# Altium PCB GCM-Test PCB BW_PCB.PcbDoc
Units mm, origin at the board's own origin, x right, y up, seen from the top; angles counter-clockwise.
Board outline 152.4 x 101.6 mm, 2 copper layers (Top Layer, Bottom Layer); 78 components, 55 nets, 175 pads, 12 vias.
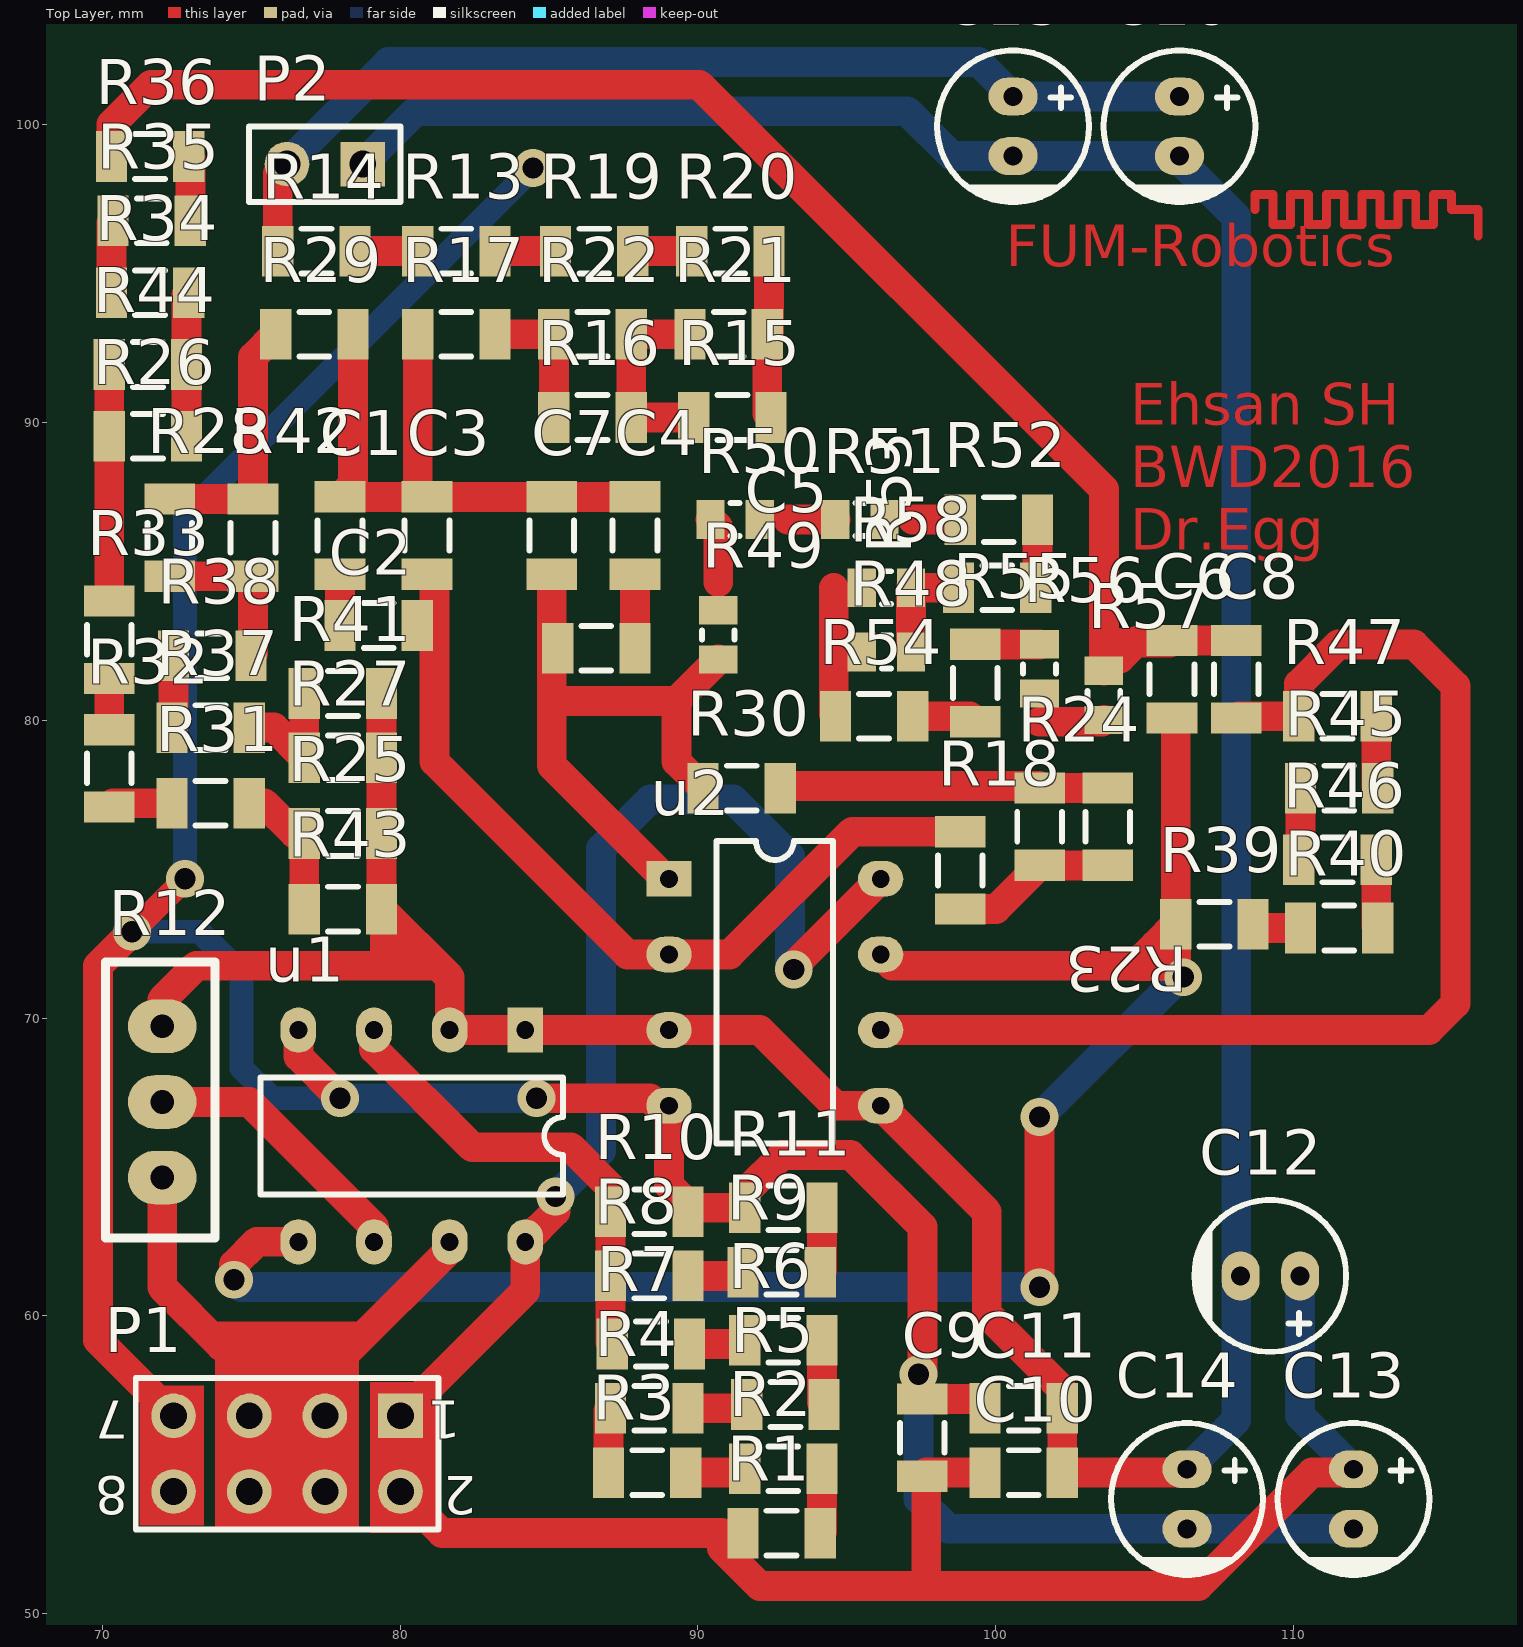
[diagram p0: Top Layer view]
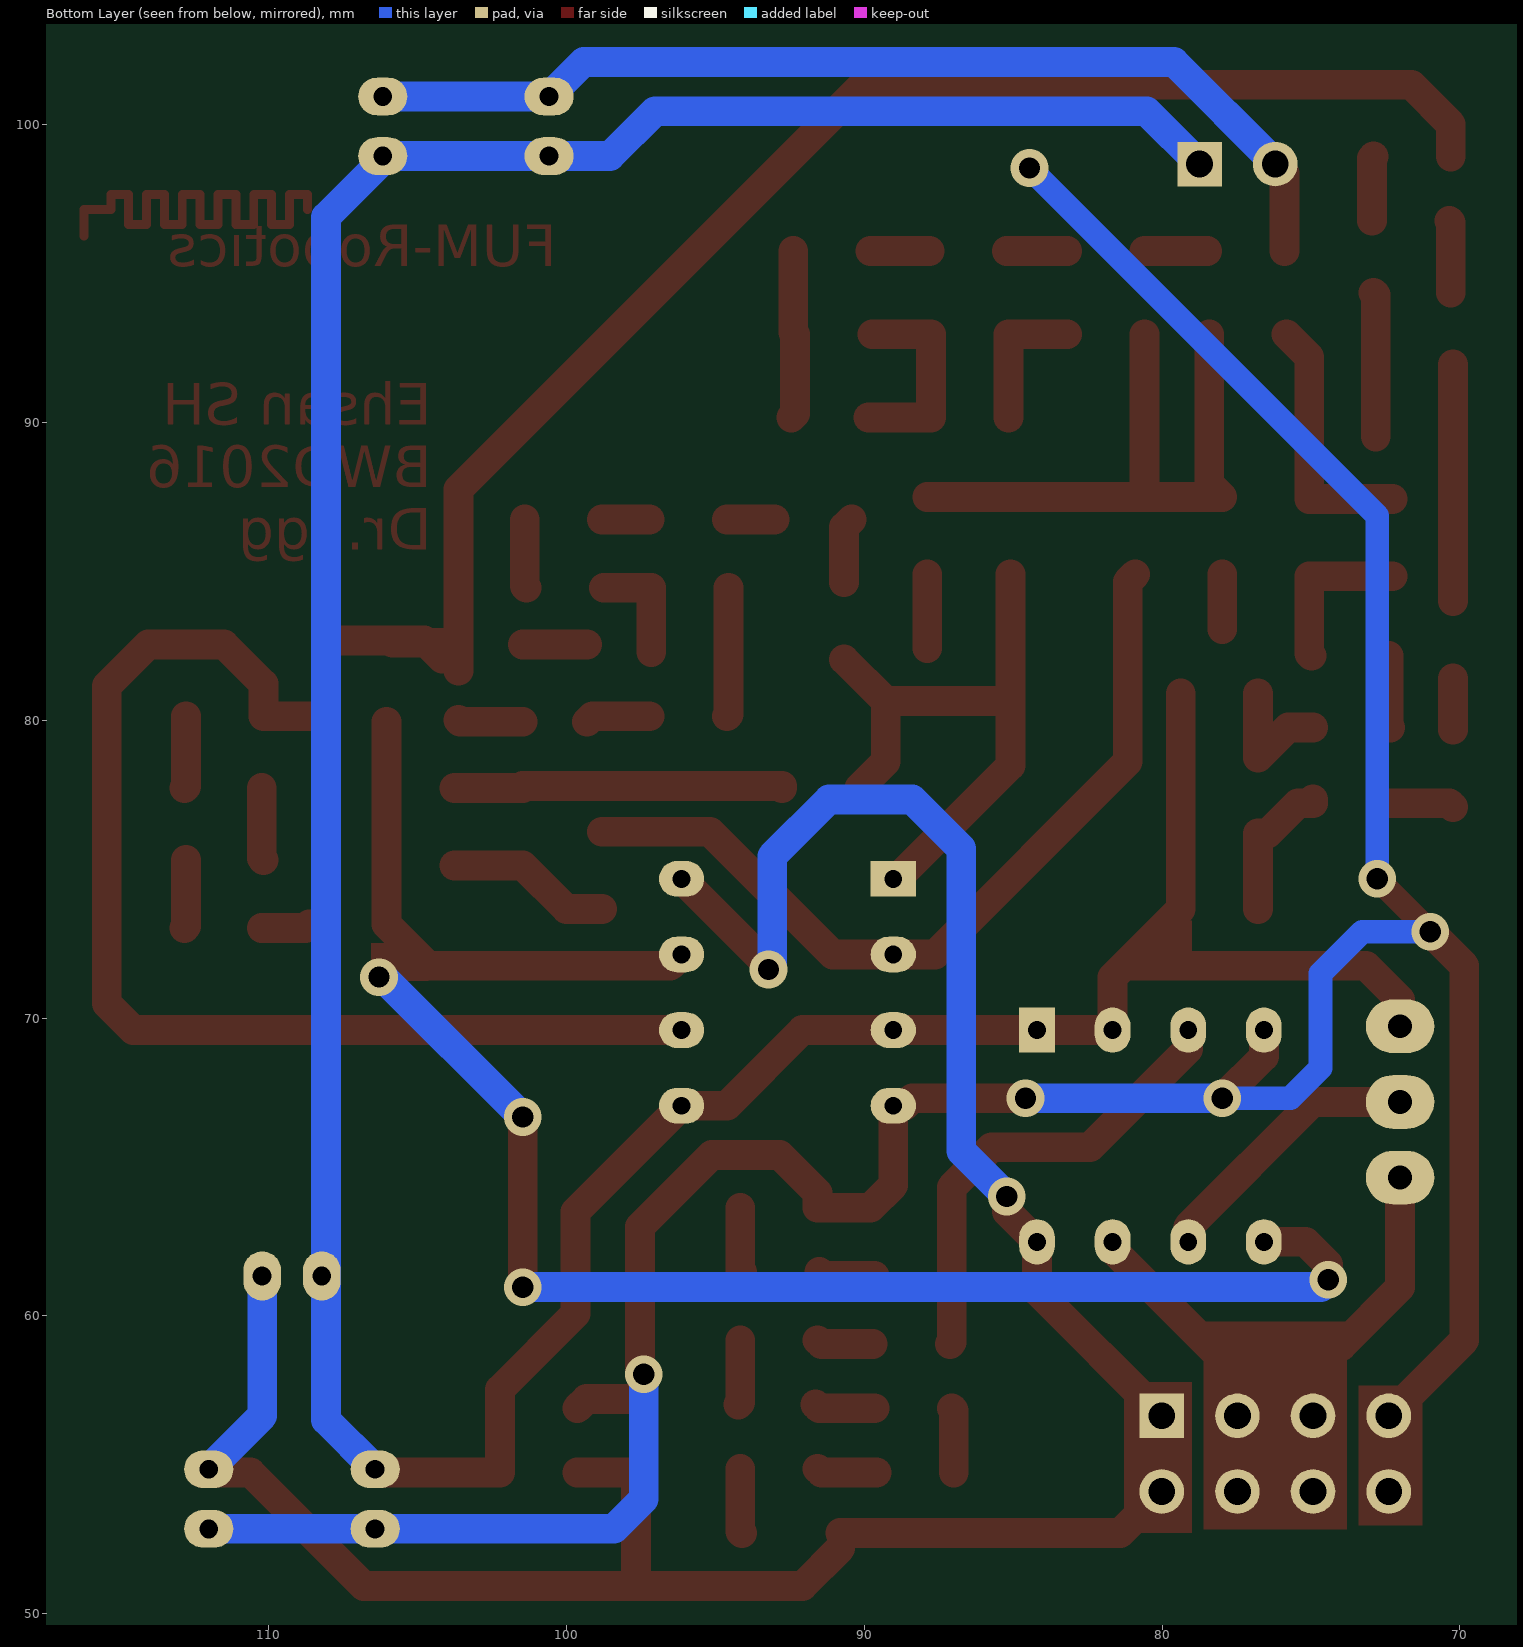
[diagram p1: Bottom Layer view, seen from below]
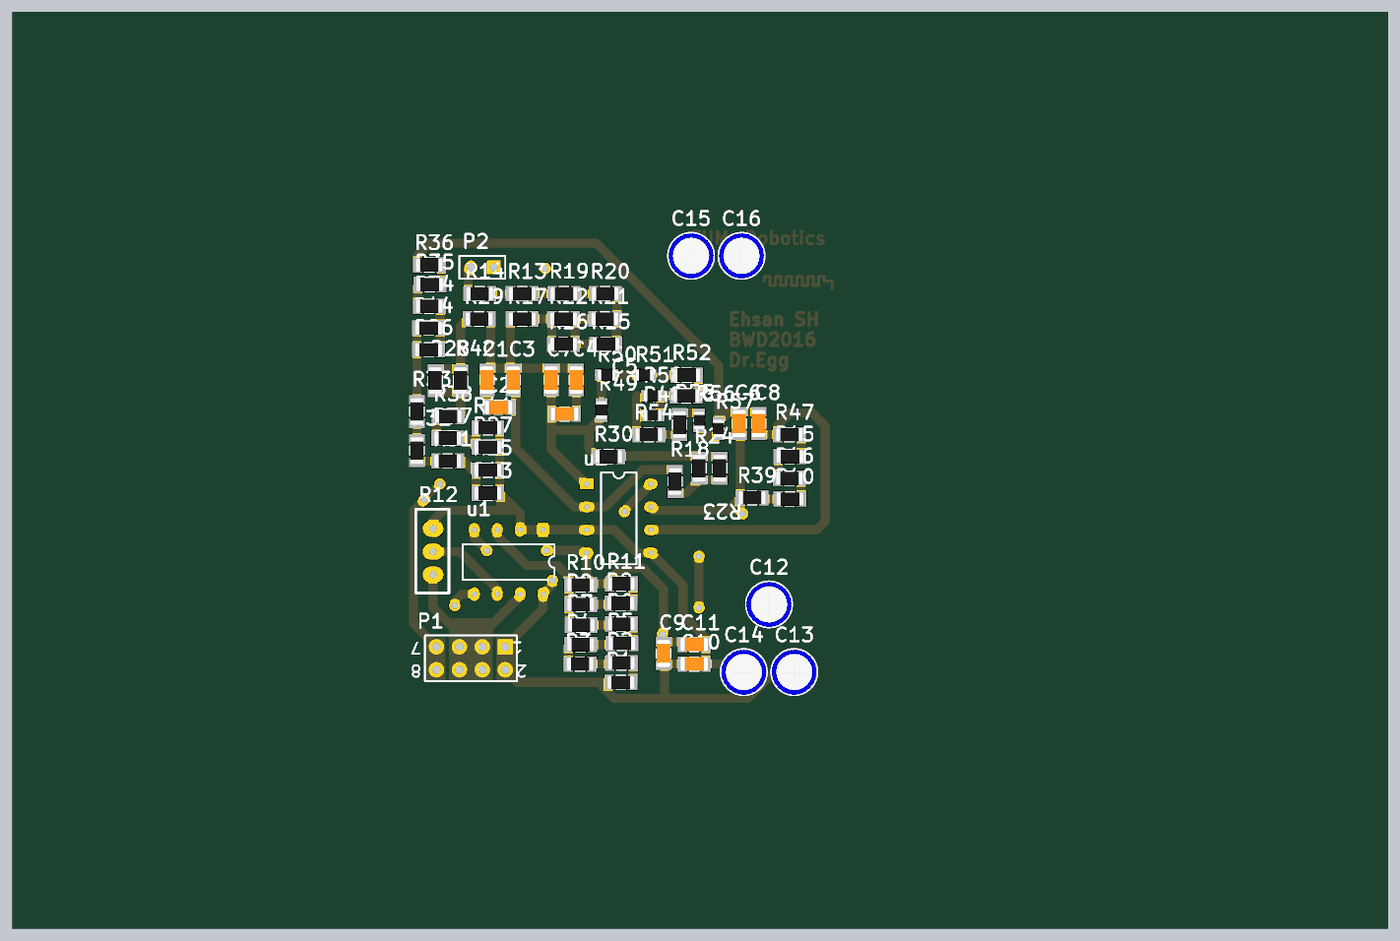
[diagram p2: 3D render of the assembled board from above, using the file's embedded part models]

## Layer stack, top to bottom
Top Solder: solder mask 0.0102, Solder Resist, Dk 3.5
Top Layer: signal copper 0.0356
Dielectric 1: dielectric 0.32, FR-4, Dk 4.8
Bottom Layer: signal copper 0.0356
Bottom Solder: solder mask 0.0102, Solder Resist, Dk 3.5

## Board outline
25.4,25.4 177.8,25.4 177.8,127 25.4,127

## Design rules (kind name [scope] priority, off if disabled: settings)
Clearance [All] p1: gap=0.254
PolygonConnect [All] p1: connectstyle=Relief reliefconductorwidth=0.254 reliefentries=4 polygonreliefangle="90 Angle" airgapwidth=0.254
RoutingVias [All] p1: holewidth=0.711 width=1.27 viastyle="Through Hole" minholewidth=0.711 minwidth=1.27 maxholewidth=0.711 maxwidth=1.27
SolderMaskExpansion [All] p1: expansion=0.102
Width [All] p1: maxlimit=1 minlimit=0.3 preferedwidth=0.7
30 further rules are at their usual default settings.

## Components (designator, comment, footprint, x,y, rotation, side; value= is the part's Value field where it differs from the comment)
C1 "1nF" SMD_CAP_1206 77.978,87.503 r270 top
C2 "1nF" SMD_CAP_1206 77.978,83.185 r0 top
C3 "10pF" SMD_CAP_1206 80.899,87.503 r270 top
C4 "1nF" SMD_CAP_1206 87.884,87.503 r270 top
C5 "1nF" SMD_CAP_1206 87.884,82.423 r180 top
C6 "1nF" SMD_CAP_1206 105.918,82.677 r270 top
C7 "10pF" SMD_CAP_1206 85.09,87.503 r270 top
C8 "1nF" SMD_CAP_1206 108.077,82.677 r270 top
C9 "1u" SMD_CAP_1206 97.536,54.61 r90 top
C10 "1u" SMD_CAP_1206 102.235,54.737 r180 top
C11 "1u" SMD_CAP_1206 102.235,56.896 r180 top
C12 "1uF   OR 680 nf Bipolar" "cap 01" 109.22,61.341 r0 top
C13 "1uF   OR 680 nf Bipolar" "cap 01" 112.014,53.848 r90 top
C14 "1uF   OR 680 nf Bipolar" "cap 01" 106.426,53.848 r90 top
C15 "Depending LC Filter Designed" "cap 01" 100.584,99.949 r90 top
C16 "Depending LC Filter Designed" "cap 01" 106.172,99.949 r90 top
P1 "Header 4X2" HDR2X4 80.01,56.642 r180 top
P2 "Header 2" HDR1X2 78.74,98.679 r180 top
R1 "0" "RES 1206 (3216X08L)" 94.107,52.705 r180 top
R2 "0" "RES 1206 (3216X08L)" 91.567,54.864 r0 top
R3 "0" "RES 1206 (3216X08L)" 86.995,54.737 r0 top
R4 "0" "RES 1206 (3216X08L)" 89.662,56.896 r180 top
R5 "0" "RES 1206 (3216X08L)" 94.234,57.023 r180 top
R6 "0" "RES 1206 (3216X08L)" 91.567,59.182 r0 top
R7 "1K" "RES 1206 (3216X08L)" 87.122,59.055 r0 top
R8 "0" "RES 1206 (3216X08L)" 89.662,61.341 r180 top
R9 "0" "RES 1206 (3216X08L)" 94.107,61.468 r180 top
R10 "NC" "RES 1206 (3216X08L)" 89.662,63.5 r180 top
R11 "1K" "RES 1206 (3216X08L)" 91.567,63.627 r0 top
R12 "POT" MOL_1 72.009,64.643 r90 top
R13 "100R" "RES 1206 (3216X08L)" 83.185,95.758 r180 top
R14 "10R" "RES 1206 (3216X08L)" 78.486,95.758 r180 top
R15 "1K" "RES 1206 (3216X08L)" 92.456,90.17 r180 top
R16 "10K" "RES 1206 (3216X08L)" 87.757,90.17 r180 top
R17 "1K" "RES 1206 (3216X08L)" 83.185,92.964 r180 top
R18 "100K" "RES 1206 (3216X08L)" 98.806,73.66 r90 top
R19 "100R" "RES 1206 (3216X08L)" 85.217,95.758 r0 top
R20 "100R" "RES 1206 (3216X08L)" 89.789,95.758 r0 top
R21 "1K" "RES 1206 (3216X08L)" 92.329,92.964 r180 top
R22 "10K" "RES 1206 (3216X08L)" 87.757,92.964 r180 top
R23 "10K" "RES 1206 (3216X08L)" 103.759,77.724 r270 top
R24 "10K" "RES 1206 (3216X08L)" 101.473,77.724 r270 top
R25 "100" "RES 1206 (3216X08L)" 79.375,76.2 r180 top
R26 "1K" "RES 1206 (3216X08L)" 70.231,89.535 r0 top
R27 "10K" "RES 1206 (3216X08L)" 79.375,78.74 r180 top
R28 "100" "RES 1206 (3216X08L)" 72.263,84.836 r90 top
R29 "100" "RES 1206 (3216X08L)" 75.819,92.964 r0 top
R30 "100K" "RES 1206 (3216X08L)" 90.17,77.724 r0 top
R31 "100" "RES 1206 (3216X08L)" 74.93,77.216 r180 top
R32 "1K" "RES 1206 (3216X08L)" 70.231,77.089 r90 top
R33 "1K" "RES 1206 (3216X08L)" 70.231,81.407 r90 top
R34 "1K" "RES 1206 (3216X08L)" 72.898,94.361 r180 top
R35 "1K" "RES 1206 (3216X08L)" 70.358,96.774 r0 top
R36 "100" "RES 1206 (3216X08L)" 72.898,98.933 r180 top
R37 "10K" "RES 1206 (3216X08L)" 74.93,79.756 r180 top
R38 "10K" "RES 1206 (3216X08L)" 72.39,82.169 r0 top
R39 "10K" "RES 1206 (3216X08L)" 106.045,73.152 r0 top
R40 "10K" "RES 1206 (3216X08L)" 110.236,73.025 r0 top
R41 "10K" "RES 1206 (3216X08L)" 79.375,80.899 r180 top
R42 "100" "RES 1206 (3216X08L)" 75.057,84.836 r90 top
R43 "100" "RES 1206 (3216X08L)" 79.375,73.66 r180 top
R44 "1K" "RES 1206 (3216X08L)" 70.231,91.948 r0 top
R45 "10K" "RES 1206 (3216X08L)" 110.236,77.724 r0 top
R46 "10K" "RES 1206 (3216X08L)" 112.776,75.311 r180 top
R47 "100K" "RES 1206 (3216X08L)" 112.776,80.137 r180 top
R48 "1K" "RES 0805 (2012X06L)" 97.155,82.296 r180 top
R49 "10" "RES 0805 (2012X06L)" 90.678,82.042 r90 top
R50 "10" "RES 0805 (2012X06L)" 90.424,86.741 r0 top
R51 "100" "RES 0805 (2012X06L)" 94.615,86.741 r0 top
R52 "1K" "RES 1206 (3216X08L)" 98.806,86.741 r0 top
R53 "1K" "RES 1206 (3216X08L)" 101.346,84.455 r180 top
R54 "1K" "RES 1206 (3216X08L)" 94.615,80.137 r0 top
R55 "1K" "RES 1206 (3216X08L)" 99.314,82.55 r270 top
R56 "10" "RES 0805 (2012X06L)" 101.473,82.55 r270 top
R57 "10" "RES 0805 (2012X06L)" 103.632,80.01 r90 top
R58 "1K" "RES 0805 (2012X06L)" 97.155,84.455 r180 top
u1 "LM358N" "lm358 dip" 84.201,69.596 r270 top
u2 "LM358N" "lm358 dip" 89.027,74.676 r0 top

## Footprints (in the part's own frame and the unit in brackets; to place one, negate y for a bottom-side part, rotate by r counter-clockwise, add the part's x,y. Pads: shape width x height; smd on the part's side, far side on the other; paste and mask are expansions set on the pad)
"cap 01" [mm]
  oval 1.27x1.651 hole 0.635: 1(1,0) 2(-1,0)
  silkscreen extent -2.55,-2.55 2.55,2.55, body extent -2.53,-2.53 2.53,2.53, height 12.54
HDR1X2 [mm] "Connector; Header; 2 Position"
  rect 1.5x1.5 hole 0.9: 1(0,0)
  round 1.5 hole 0.9: 2(2.54,0)
  silkscreen extent -1.27,-1.27 3.81,1.27
HDR2X4 [mm] "Connector; Header; 4x2 Position"
  rect 1.5x1.5 hole 0.9: 1(0,0)
  round 1.5 hole 0.9: 2(0,2.54) 3(2.54,0) 4(2.54,2.54) 5(5.08,0) 6(5.08,2.54) 7(7.62,0) 8(7.62,2.54)
  silkscreen extent -1.27,-1.27 8.89,3.81
"lm358 dip" [mm]
  rect 1.52x1.2 / inner rect 1.42x1.2 / far side rect 1.52x1.2 hole 0.6: 1(0,0)
  oval 1.52x1.2 / inner oval 1.42x1.2 / far side oval 1.52x1.2 hole 0.6: 2(0,-2.54) 3(0,-5.08) 4(0,-7.62) 5(7.11,-7.62) 6(7.11,-5.08) 7(7.11,-2.54) 8(7.11,0)
  silkscreen extent 1.59,-8.89 5.52,1.27
MOL_1 [mm]
  oval 1.8x2.3 hole 0.8: 1(0,0) 2(2.54,0) 3(5.08,0)
  silkscreen extent -2.03,-1.78 7.24,1.91
"RES 0805 (2012X06L)" [mm] "Chip Resistor, 2-Leads, Body 2.0x1.3mm, IPC High Density _ (0.100 W)"
  rect 0.95x1.3 smd: 1(0,0) 2(1.65,0)
  silkscreen extent 0.67,-0.55 0.97,0.55, body extent -0.19,-0.63 1.84,0.64, height 0.6
"RES 1206 (3216X08L)" [mm] "Chip Resistor, 2-Leads, Body 3.2x1.6mm, IPC High Density _ (0.125 W)"
  rect 1.05x1.7 smd: 1(0,0) 2(2.596,0)
  silkscreen extent 0.8,-0.75 1.8,0.75, body extent -0.23,-0.76 2.82,0.76, height 0.6
SMD_CAP_1206 [mm]
  rect 1.05x1.7 smd: 1(0,0) 2(2.596,0)
  silkscreen extent 0.8,-0.75 1.8,0.75, body extent -0.22,-0.77 2.82,0.75, height 0.75

## Part data
C1 C2 C3 C4 C5 C6 C7 C8 C9 C10 C11: library part Cap-Bipolar, "Bipolar Capacitor"
C12 C13 C14 C15 C16: library part Cap-Polar, "Polar Capacitor"
P1: "Header, 4-Pin, Dual row"
P2: "Header, 2-Pin"
R1 R2 R3 R4 R5 R6 R7 R8 R9 R10 R11 R13 R14 R15 R16 R17 R18 R19 R20 R21 R22 R23 R24 R25 R26 R27 R28 R29 R30 R31 R32 R33 R34 R35 R36 R37 R38 R39 R40 R41 R42 R43 R44 R45 R46 R47 R48 R49 R50 R51 R52 R53 R54 R55 R56 R57 R58: library part Resistor, "Resistor"

## Via types
v1: diameter 1.27, hole 0.711, Top Layer to Bottom Layer, 12 vias

## Nets (pads, with @x,y where several pads share a name; then routed paths per layer and width w, separated by ;. In a path a pad name is that pad's centre, name@x,y a point inside that pad or via, vN(x,y) a via of type N, cw(c..) or ccw(c..) an arc to the next point about the centre after c; other vN are vias at no path point)
+5: C9.1 C10.2 C12.1 C13.1 P1.1 P1.2 R1.2 u1.8 u2.8 | length 88.3
  Top Layer w1: v1(85.217,64.008) 85.217,63.502 u1.8 84.201,60.833 P1.1 P1.2 81.407,52.705 90.805,52.705 ; 90.805,52.197 92.075,50.927 106.807,50.927 110.617,54.737 C13.1@112.268,54.737 ; v1(93.218,71.628) 93.218,71.757 u2.8 ; 97.663,50.927 97.663,54.737 C10.2
  Bottom Layer w1: v1(85.217,64.008) 86.741,65.532 86.741,75.692 88.392,77.343 91.186,77.343 93.091,75.438 93.091,71.755 v1(93.218,71.628) ; C12.1 110.22,56.642 C13.1
COIL1SIGNAL: C15.1 C16.1 P2.2 R14.2 | length 34.5
  Top Layer w1: R14.2 P2.2@75.89,98.369
  Bottom Layer w1: P2.2 76.2,98.705 79.603,102.108 99.425,102.108 C15.1 C16.1
"FEEDBACK A": C5.2 C7.2 R30.1 R49.1 u2.1 | length 21.1
  Top Layer w1: C7.2 85.09,78.486 u2.1@88.9,74.676 ; 85.217,80.645 89.281,80.645 ; R30.1 89.281,78.613 89.281,80.645 ; R49.1 89.281,80.645
"FEEDBACK B": C6.2 R39.1 u1.5 u2.7 | length 61.5
  Top Layer w1: v1(74.422,61.214) 74.422,61.722 75.186,62.486 u1.5 ; u2.7 96.518,71.755 104.648,71.755 105.346,72.453 ; v1(101.473,60.96) v1(101.473,66.675) ; C6.2@106.045,79.954 R39.1 105.346,72.453 ; v1(106.299,71.374) 105.346,72.326 105.346,72.453
  Bottom Layer w1: v1(74.422,61.214) 74.664,60.972 101.461,60.972 v1(101.473,60.96) ; v1(101.473,66.675) 106.172,71.374 v1(106.299,71.374)
GND: C9.2 C11.2 C13.2 C14.2 P1.7 P1.8 R10.1 R11.1 u1.4 u2.4 | length 114.3
  Top Layer w0.8: v1(70.993,72.898) v1(72.771,74.676) ; v1@84.328,98.679 v1(84.455,98.552)
  Top Layer w1: v1(70.993,72.898) 69.85,71.755 69.85,59.182 P1.7 ; u1.4 76.581,68.707 v1(77.978,67.31) ; v1(84.582,67.31) 88.392,67.31 88.646,67.056 u2.4 89.027,64.389 89.789,63.627 R11.1 91.567,64.135 92.837,65.405 95.123,65.405 97.536,62.992 v1@97.536,58.039 ; C9.2 99.329,57.206 C11.2
  Bottom Layer w0.8: v1(70.993,72.898) 73.279,72.898 74.676,71.501 74.676,68.326 75.692,67.31 v1(77.978,67.31) ; v1(72.771,74.676) 72.771,86.868 v1(84.455,98.552)
  Bottom Layer w1: v1(77.978,67.31) v1(84.582,67.31) ; v1(97.409,58.039) 97.409,53.848 98.409,52.848 C14.2 C13.2
INA-: C2.2 C3.2 R18.2 u2.2 | length 28.4
  Top Layer w1: C3.2 81.153,84.653 81.153,78.613 87.63,72.136 u2.2 91.059,72.136 95.179,76.256 R18.2
INB-: C8.2 R47.2 u2.6 | length 39.9
  Top Layer w1: u2.6 114.554,69.596 115.443,70.485 115.443,81.153 114.046,82.55 111.506,82.55 110.18,81.224 R47.2 108.133,80.137 C8.2
NetC1_1: C1.1 C3.1 C4.1 C7.1 R17.2 R29.2 | length 20.7
  Top Layer w1: R29.2 78.415,87.94 C1.1 C3.1 C7.1 C4.1 ; C3.1@80.589,87.813 R17.2
NetC1_2: C1.2 C2.1 | length 1.8
  Top Layer w1: C2.1@77.978,83.058 C1.2
NetC4_2: C4.2 C5.1 | length 2.5
  Top Layer w1: C5.1 C4.2
NetC6_1: C6.1 C8.1 R36.2 R57.2 | length 53.1
  Top Layer w1: R36.2 70.302,100.02 71.628,101.346 90.043,101.346 103.632,87.757 R57.2 ; 103.632,82.606 C6.1@105.847,82.606 ; R57.2@104.176,82.078 104.775,82.677 C6.1 C8.1
NetR1_1: R1.1 R2.2 | length 2.2
  Top Layer w1: R1.1 94.163,52.761 R2.2
NetR2_1: R2.1 R3.2 | length 2
  Top Layer w1: R3.2 91.44,54.737 R2.1
NetR3_1: R3.1 R4.2 | length 2.2
  Top Layer w1: R3.1 86.995,56.825 R4.2
NetR4_1: R4.1 R5.2 | length 2
  Top Layer w1: R4.1 91.511,56.896 R5.2
NetR5_1: R5.1 R6.2 | length 2.2
  Top Layer w1: R6.2 94.163,57.094 R5.1
NetR6_1: R6.1 R7.2 | length 1.9
  Top Layer w1: R7.2 91.44,59.055 R6.1
NetR8_1: R8.1 R9.2 | length 1.9
  Top Layer w1: R8.1 91.384,61.341 R9.2
NetR9_1: R9.1 R11.2 | length 2.2
  Top Layer w1: R9.1 94.163,61.524 R11.2
NetR12_2: R12.2 u1.6 | length 9.4
  Top Layer w1: R12.2 74.93,67.183 79.121,62.992 u1.6
NetR13_1: R13.1 R19.1 | length 2
  Top Layer w1: R13.1 R19.1
NetR13_2: R13.2 R14.1 | length 2.1
  Top Layer w1: R14.1 R13.2
NetR15_1: R15.1 R20.2 R21.1 | length 5.7
  Top Layer w1: R20.2 92.385,93.02 R21.1 92.329,90.297 R15.1
NetR15_2: R15.2 R16.1 R21.2 R22.1 | length 6.9
  Top Layer w1: R21.2 R22.1 R16.1 R15.2
NetR16_2: R16.2 R17.1 R22.2 | length 4.8
  Top Layer w1: R17.1 R22.2 R16.2
NetR18_1: R18.1 R23.2 R24.2 | length 5.6
  Top Layer w1: R18.1 100.005,73.66 R24.2 R23.2
NetR19_2: R19.2 R20.1 | length 2
  Top Layer w1: R19.2 R20.1
NetR23_1: R23.1 R24.1 R30.2 | length 11.1
  Top Layer w1: R30.2 92.766,77.789 R24.1@101.473,77.789 ; R24.1 R23.1
NetR25_2: R25.2 R31.1 R43.2 | length 5
  Top Layer w1: R31.1 75.438,77.216 76.454,76.2 R25.2 R43.2 ; R31.1@74.93,77.343 R31.1@75.057,77.216
NetR26_1: R26.1 R33.2 R44.1 | length 7.9
  Top Layer w1: R33.2 R26.1 R44.1
NetR26_2: R26.2 R34.1 R44.2 | length 4.9
  Top Layer w1: R26.2 R44.2 72.827,94.29 R34.1
NetR27_2: R27.2 R37.1 R41.2 | length 4.4
  Top Layer w1: R37.1 75.763,79.756 R27.2 R41.2
NetR28_1: R28.1 R38.2 R42.1 | length 5.5
  Top Layer w1: R28.1 R42.1 75.057,82.24 R38.2
NetR28_2: R28.2 R29.1 R42.2 | length 8.6
  Top Layer w1: R28.2 R42.2 75.057,92.202 R29.1
NetR31_2: R31.2 R32.1 | length 2.2
  Top Layer w1: R32.1 70.358,77.216 R31.2
NetR32_2: R32.2 R33.1 | length 1.7
  Top Layer w1: R32.2 R33.1
NetR34_2: R34.2 R35.1 | length 2.4
  Top Layer w1: R34.2 70.302,96.718 R35.1
NetR35_2: R35.2 R36.1 | length 2.2
  Top Layer w1: R36.1 72.954,98.877 R35.2
NetR37_2: R37.2 R38.1 | length 2.4
  Top Layer w1: R37.2 72.39,79.812 R38.1
NetR39_2: R39.2 R40.1 | length 1.6
  Top Layer w1: R39.2 108.768,73.025 R40.1
NetR40_2: R40.2 R46.1 | length 2.3
  Top Layer w1: R46.1 112.776,73.081 R40.2
NetR45_1: R45.1 R46.2 | length 2.4
  Top Layer w1: R46.2 110.236,75.367 R45.1
NetR45_2: R45.2 R47.1 | length 2.4
  Top Layer w1: R47.1 112.776,77.78 R45.2
NetR48_1: R48.1 R53.2 R58.1 | length 3.8
  Top Layer w1: R48.1 R58.1 R53.2
NetR48_2: R48.2 R54.1 R58.2 | length 4.3
  Top Layer w1: 94.559,84.455 94.559,82.296 94.559,80.193 R54.1
NetR49_2: R49.2 R50.1 | length 2.2
  Top Layer w1: R50.1 90.678,86.487 90.678,84.638
NetR50_2: R50.2 R51.1 | length 1.6
  Top Layer w1: 93.02,86.741 R51.1
NetR51_2: R51.2 R52.1 | length 1.6
  Top Layer w1: 97.211,86.741 R52.1
NetR52_2: R52.2 R53.1 | length 2.3
  Top Layer w1: R53.1 101.402,84.511 R52.2
NetR54_2: R54.2 R55.2 | length 2.2
  Top Layer w1: R54.2 99.131,80.137 R55.2
NetR55_1: R55.1 R56.1 | length 2.2
  Top Layer w1: R55.1 R56.1
NetR56_2: R56.2 R57.1 | length 2.2
  Top Layer w1: 101.473,79.954 103.576,79.954 R57.1
OUT: P1.3 P1.4 P1.5 P1.6 R12.1 u1.7 | length 22.3
  Top Layer w1: R12.1 72.009,60.96 73.977,58.991 ; P1.6 P1.4 ; 74.93,58.674 P1.5 P1.4 ; P1.3 P1.4 ; 78.232,58.801 81.661,62.23 u1.7
"REFRENCE FEEDBACK": C10.1 C11.1 C12.2 C14.1 C15.2 C16.2 P2.1 R12.3 R25.1 R27.1 R41.1 R43.1 u1.1 u1.2 u2.3 u2.5 | length 132.2
  Top Layer w1: R12.3 72.009,70.612 73.152,71.755 81.28,71.755 81.661,71.374 ; R41.1 R27.1 R25.1 R43.1 81.661,71.374 ; C14.1@106.315,54.737 C10.1 C11.1 102.235,57.531 99.695,60.071 99.695,63.498 u2.5 94.615,67.056 92.075,69.596 u2.3 u1.1 u1.2 81.661,71.374
  Bottom Layer w1: P2.1 80.518,100.457 97.028,100.457 98.536,98.949 C15.2 106.029,98.949 108.077,96.901 108.077,56.499 C14.1
"REFRENCE VOLTAGE DIV": R7.1 R8.2 R10.2 u1.3 | length 15.8
  Top Layer w1: u1.3 79.121,68.961 82.423,65.659 85.725,65.659 87.066,64.318 R10.2 R8.2 87.066,59.111 R7.1
copper on no net: | length 19.4
  Top Layer w0.3: 108.705,97.155 108.705,97.655 109.305,97.655 109.305,96.655 109.905,96.655 109.905,97.655 110.505,97.655 110.505,96.655 111.105,96.655 111.105,97.655 111.705,97.655 111.705,96.655 112.305,96.655 112.305,97.655 112.905,97.655 112.905,96.655 113.505,96.655 113.505,97.655 114.105,97.655 114.105,96.655 114.705,96.655 114.705,97.655 115.305,97.655 115.305,97.155 116.205,97.155 116.205,96.266

## Other copper
Top Layer:
  rectangle net "REFRENCE FEEDBACK": 78.994,72.009 80.264,73.279
  rectangle net OUT: 73.787,52.832 78.613,59.817
  rectangle net +5: 78.994,52.705 81.28,57.785
  rectangle net GND: 71.247,52.959 73.406,57.658
  region net "FEEDBACK B": 106.553,71.501 106.553,72.517 105.156,72.517 104.648,72.009 104.648,71.247 106.172,71.247 106.299,71.374
  text "FUM-Robotics" at 100.33,95.25 h1.4
  text "Ehsan SH / BWD2016 / Dr.Egg" at 104.521,85.725 h1.4

## Silkscreen, mask and mechanical layers (free items; w line width, h text height)
Mechanical 1:
  lines w0.254: 67.691,103.378 117.602,103.378 117.602,50.419 117.729,50.292 67.945,50.292 67.818,50.419 67.818,103.251 67.691,103.378

## Text inside footprints (layer, text, board x,y; h text height)
P1: Top Overlay "8" at 70.866,54.61 h1.27 r180; Top Overlay "7" at 70.866,57.15 h1.27 r180; Top Overlay "1" at 82.042,57.15 h1.27 r180; Top Overlay "2" at 82.55,54.61 h1.27 r180